# Altium PCB ESP32_LED_Matrix_Partially_Unrouted.PcbDoc
Units mm, origin at the board's own origin, x right, y up, seen from the top; angles counter-clockwise.
Board outline 83 x 52.3 mm, 2 copper layers (Top Layer, Bottom Layer), stack 1.671 mm thick; 168 components, 98 nets, 513 pads, 143 vias.
Unrouted connection lines stored in the file: 136.
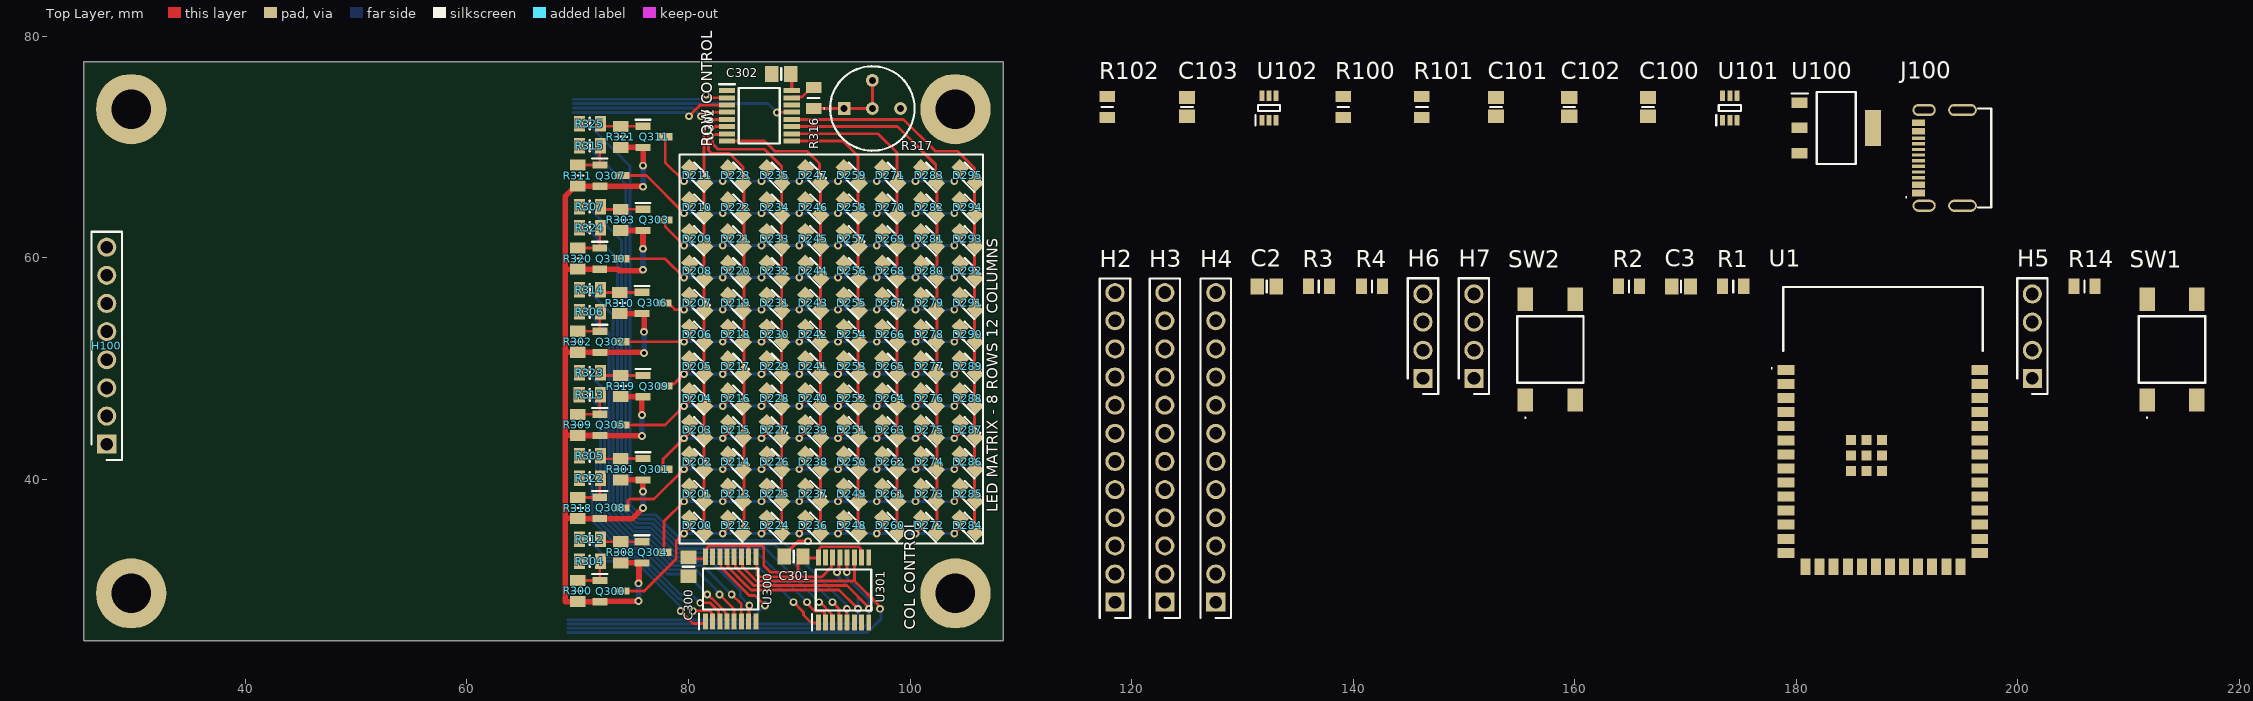
[diagram p0: Top Layer view]
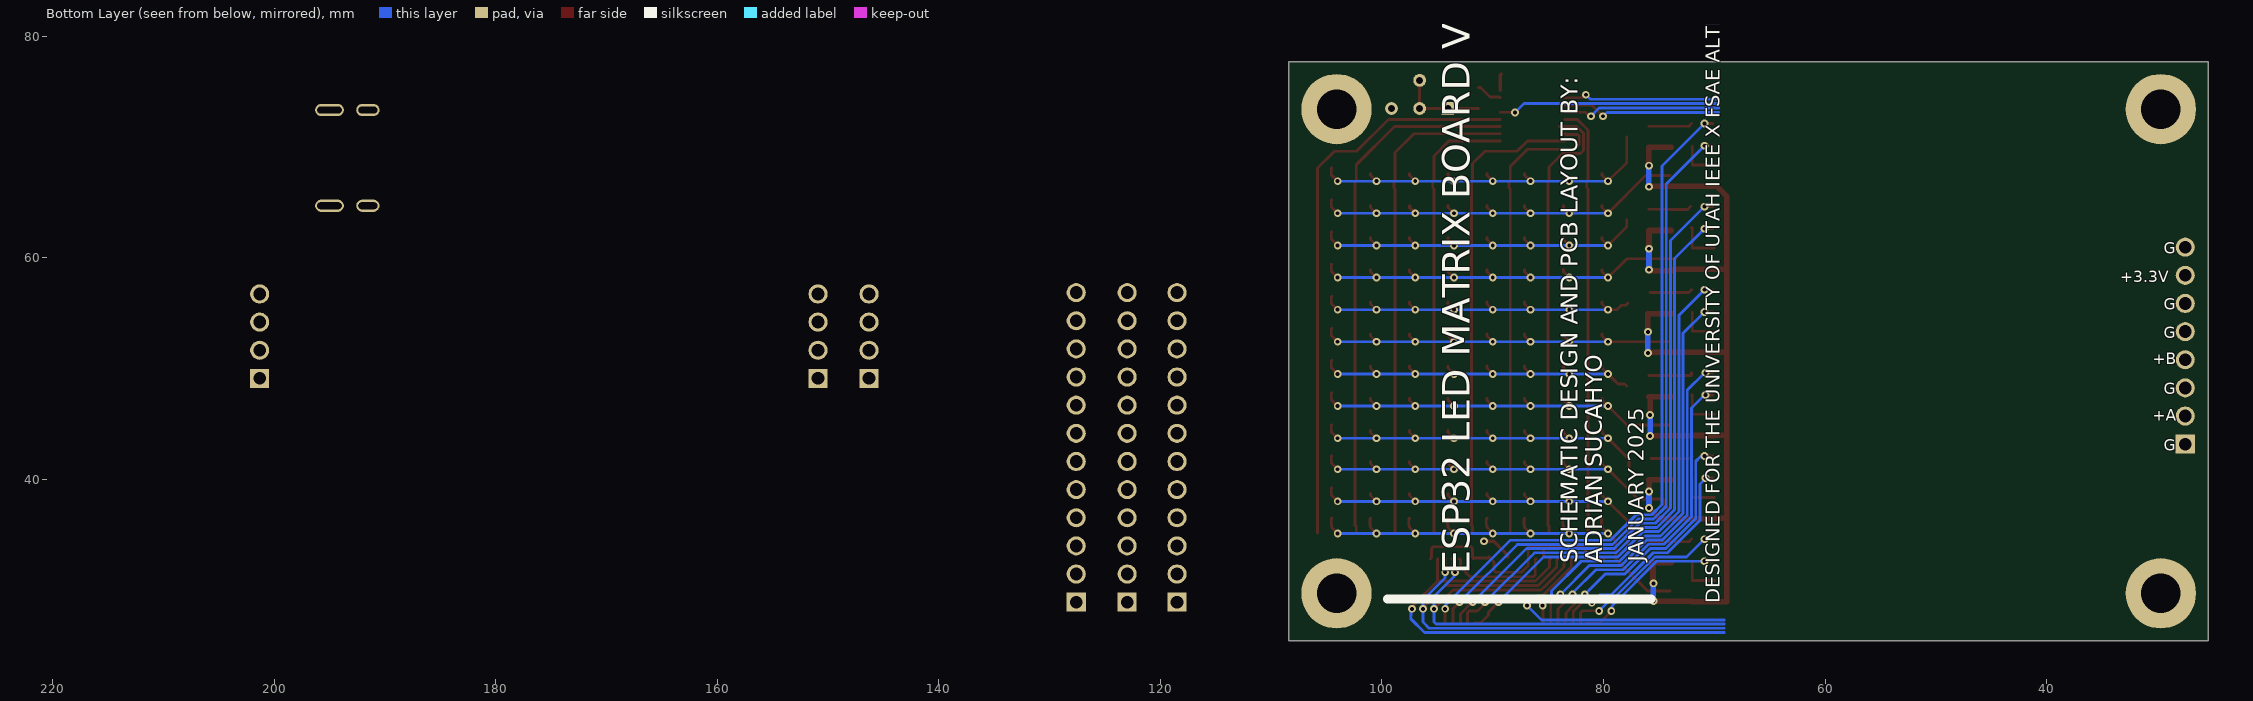
[diagram p1: Bottom Layer view, seen from below]

## Layer stack, top to bottom
Top Solder: solder mask 0.0102, Solder Resist, Dk 3.5
Top Layer: signal copper 0.0356
Dielectric 1: dielectric 1.6, FR-4, Dk 4.8
Bottom Layer: signal copper 0.0356
Bottom Solder: solder mask 0.0102, Solder Resist, Dk 3.5

## Board outline
25.4,25.4 108.4,25.4 108.4,77.7 25.4,77.7

## Design rules (kind name [scope] priority, off if disabled: settings)
Clearance [All] p1: gap=0.127 ignorepadtopadclearanceinfootprint=TRUE
ComponentClearance [All] p1: gap=0 collisioncheckmode=3 verticalgap=0.05 showdistances=FALSE
DiffPairsRouting [All] p1: maxlimit=0.254 minlimit=0.127 mostfreqgap=0.254 toplayer_minwidth=0.1 toplayer_maxwidth=0.5 toplayer_prefwidth=0.381 bottomlayer_minwidth=0.1 bottomlayer_maxwidth=0.5 bottomlayer_prefwidth=0.381 maxuncoupledlength=12.7
HoleSize [All] p1: absolutevalues=TRUE maxlimit=15 minlimit=0.025 maxpercent=80.000 minpercent=20.000
MinimumSolderMaskSliver [All] p1: minsoldermaskwidth=0
PolygonConnect [All] p1: connectstyle=Relief reliefconductorwidth=0.254 reliefentries=4 polygonreliefangle="90 Angle" airgapwidth=0.254
RoomDefinition "LED Matrix" [InComponentClass('Room Definition1') vs False] p1: confinementstyle=ConfineIn formatcopy=TRUE lockcomponents=FALSE outline 68.5,25.4 108.4,25.4 108.4,77.7 68.5,77.7
RoutingVias [All] p1: holewidth=0.35 width=0.7 viastyle="Through Hole" minholewidth=0.3 minwidth=0.6 maxholewidth=1 maxwidth=2
SilkToSilkClearance [All] p1: silktosilkclearance=0
SilkToSolderMaskClearance [IsPad] p1: minsilkscreentomaskgap=0 clearancetoexposedcopper=TRUE
SolderMaskExpansion [All] p1: expansion=0.102 istentingtop=FALSE
SupplyNets "Schematic Supply Nets_9" [InNet('V_MCU')] p1: voltage=0.000
SupplyNets "Schematic Supply Nets_8" [InNet('VCC_2')] p2: voltage=0.000
SupplyNets "Schematic Supply Nets_7" [InNet('VCC_1')] p3: voltage=0.000
SupplyNets "Schematic Supply Nets_6" [InNet('GND')] p4: voltage=0.000
SupplyNets "Schematic Supply Nets_4" [InNet('+3.3')] p5: voltage=0.000
Width [All] p1: maxlimit=2 minlimit=0.1 preferedwidth=0.254
24 further rules are at their usual default settings.

## Classes and differential pairs
component class "Room Definition1": C300 C301 C302 D200 D201 D202 D203 D204 D205 D206 D207 D208 D209 D210 D211 D212 D213 D214 D215 D216 D217 D218 D219 D220 D221 D222 D223 D224 D225 D226 D227 D228 D229 D230 D231 D232 D233 D234 D235 D236 D237 D238 D239 D240 D241 D242 D243 D244 D245 D246 D247 D248 D249 D250 D251 D252 D253 D254 D255 D256 D257 D258 D259 D260 D261 D262 D263 D264 D265 D266 D267 D268 D269 D270 D271 D272 D273 D274 D275 D276 D277 D278 D279 D280 D281 D282 D283 D284 D285 D286 D287 D288 D289 D290 D291 D292 D293 D294 D295 Q300 Q301 Q302 Q303 Q304 Q305 Q306 Q307 Q308 Q309 Q310 Q311 R300 R301 R302 R303 R304 R305 R306 R307 R308 R309 R310 R311 R312 R313 R314 R315 R316 R317 R318 R319 R320 R321 R322 R323 R324 R325 U300 U301 U302
component class Designator: D200 D201 D202 D203 D204 D205 D206 D207 D208 D209 D210 D211 D212 D213 D214 D215 D216 D217 D218 D219 D220 D221 D222 D223 D224 D225 D226 D227 D228 D229 D230 D231 D232 D233 D234 D235 D236 D237 D238 D239 D240 D241 D242 D243 D244 D245 D246 D247 D248 D249 D250 D251 D252 D253 D254 D255 D256 D257 D258 D259 D260 D261 D262 D263 D264 D265 D266 D267 D268 D269 D270 D271 D272 D273 D274 D275 D276 D277 D278 D279 D280 D281 D282 D283 D284 D285 D286 D287 D288 D289 D290 D291 D292 D293 D294 D295
net class ROW[0..7]: ROW0 ROW1 ROW2 ROW3 ROW4 ROW5 ROW6 ROW7
net class COL_SIG[0..11]: COL_SIG0 COL_SIG1 COL_SIG2 COL_SIG3 COL_SIG4 COL_SIG5 COL_SIG6 COL_SIG7 COL_SIG8 COL_SIG9 COL_SIG10 COL_SIG11
net class COL[0..11]: COL0 COL1 COL2 COL3 COL4 COL5 COL6 COL7 COL8 COL9 COL10 COL11
component class "Power Supply": C100 C101 C102 C103 H100 J100 R100 R101 R102 U100 U101 U102
component class Designator: C300 C301 C302 Q300 Q301 Q302 Q303 Q304 Q305 Q306 Q307 Q308 Q309 Q310 Q311 R300 R301 R302 R303 R304 R305 R306 R307 R308 R309 R310 R311 R312 R313 R314 R315 R316 R317 R318 R319 R320 R321 R322 R323 R324 R325 U300 U301 U302
component class Microcontroller: C2 C3 H2 H3 H4 H5 H6 H7 R1 R2 R3 R4 R14 SW1 SW2 U1
differential pair USB_D: +USB_D_P -USB_D_N

## Components (designator, comment, footprint, x,y, rotation, side; value= is the part's Value field where it differs from the comment)
C2 "100n" CAP0805 132.2,57.4 r0 top
C3 "1u" CAP0805 169.6,57.4 r0 top
C100 "100n" CAP0805 166.6,73.6 r90 top
C101 "100n" CAP0805 152.9,73.6 r90 top
C102 "100n" CAP0805 159.5,73.6 r90 top
C103 "100n" CAP0805 125,73.6 r90 top
C300 "100n" CAP0805 80,32.1 r270 top locked
C301 "100n" CAP0805 89.498,33.017 r180 top locked
C302 "100n" CAP0805 88.38,76.577 r180 top locked
D200 "LED" LEDM2012X80N 80.8,35.827 r135 top locked
D201 "LED" LEDM2012X80N 80.8,38.7 r135 top locked
D202 "LED" LEDM2012X80N 80.8,41.573 r135 top locked
D203 "LED" LEDM2012X80N 80.8,44.446 r135 top locked
D204 "LED" LEDM2012X80N 80.8,47.319 r135 top locked
D205 "LED" LEDM2012X80N 80.8,50.192 r135 top locked
D206 "LED" LEDM2012X80N 80.8,53.065 r135 top locked
D207 "LED" LEDM2012X80N 80.8,55.939 r135 top locked
D208 "LED" LEDM2012X80N 80.8,58.812 r135 top locked
D209 "LED" LEDM2012X80N 80.8,61.685 r135 top locked
D210 "LED" LEDM2012X80N 80.8,64.558 r135 top locked
D211 "LED" LEDM2012X80N 80.8,67.431 r135 top locked
D212 "LED" LEDM2012X80N 84.286,35.827 r135 top locked
D213 "LED" LEDM2012X80N 84.286,38.7 r135 top locked
D214 "LED" LEDM2012X80N 84.286,41.573 r135 top locked
D215 "LED" LEDM2012X80N 84.286,44.446 r135 top locked
D216 "LED" LEDM2012X80N 84.286,47.319 r135 top locked
D217 "LED" LEDM2012X80N 84.286,50.192 r135 top locked
D218 "LED" LEDM2012X80N 84.286,53.065 r135 top locked
D219 "LED" LEDM2012X80N 84.286,55.939 r135 top locked
D220 "LED" LEDM2012X80N 84.286,58.812 r135 top locked
D221 "LED" LEDM2012X80N 84.286,61.685 r135 top locked
D222 "LED" LEDM2012X80N 84.286,64.558 r135 top locked
D223 "LED" LEDM2012X80N 84.286,67.431 r135 top locked
D224 "LED" LEDM2012X80N 87.771,35.827 r135 top locked
D225 "LED" LEDM2012X80N 87.771,38.7 r135 top locked
D226 "LED" LEDM2012X80N 87.771,41.573 r135 top locked
D227 "LED" LEDM2012X80N 87.771,44.446 r135 top locked
D228 "LED" LEDM2012X80N 87.771,47.319 r135 top locked
D229 "LED" LEDM2012X80N 87.771,50.192 r135 top locked
D230 "LED" LEDM2012X80N 87.771,53.065 r135 top locked
D231 "LED" LEDM2012X80N 87.771,55.939 r135 top locked
D232 "LED" LEDM2012X80N 87.771,58.812 r135 top locked
D233 "LED" LEDM2012X80N 87.771,61.685 r135 top locked
D234 "LED" LEDM2012X80N 87.771,64.558 r135 top locked
D235 "LED" LEDM2012X80N 87.771,67.431 r135 top locked
D236 "LED" LEDM2012X80N 91.257,35.827 r135 top locked
D237 "LED" LEDM2012X80N 91.257,38.7 r135 top locked
D238 "LED" LEDM2012X80N 91.257,41.573 r135 top locked
D239 "LED" LEDM2012X80N 91.257,44.446 r135 top locked
D240 "LED" LEDM2012X80N 91.257,47.319 r135 top locked
D241 "LED" LEDM2012X80N 91.257,50.192 r135 top locked
D242 "LED" LEDM2012X80N 91.257,53.065 r135 top locked
D243 "LED" LEDM2012X80N 91.257,55.939 r135 top locked
D244 "LED" LEDM2012X80N 91.257,58.812 r135 top locked
D245 "LED" LEDM2012X80N 91.257,61.685 r135 top locked
D246 "LED" LEDM2012X80N 91.257,64.558 r135 top locked
D247 "LED" LEDM2012X80N 91.257,67.431 r135 top locked
D248 "LED" LEDM2012X80N 94.743,35.827 r135 top locked
D249 "LED" LEDM2012X80N 94.743,38.7 r135 top locked
D250 "LED" LEDM2012X80N 94.743,41.573 r135 top locked
D251 "LED" LEDM2012X80N 94.743,44.446 r135 top locked
D252 "LED" LEDM2012X80N 94.743,47.319 r135 top locked
D253 "LED" LEDM2012X80N 94.743,50.192 r135 top locked
D254 "LED" LEDM2012X80N 94.743,53.065 r135 top locked
D255 "LED" LEDM2012X80N 94.743,55.939 r135 top locked
D256 "LED" LEDM2012X80N 94.743,58.812 r135 top locked
D257 "LED" LEDM2012X80N 94.743,61.685 r135 top locked
D258 "LED" LEDM2012X80N 94.743,64.558 r135 top locked
D259 "LED" LEDM2012X80N 94.743,67.431 r135 top locked
D260 "LED" LEDM2012X80N 98.229,35.827 r135 top locked
D261 "LED" LEDM2012X80N 98.229,38.7 r135 top locked
D262 "LED" LEDM2012X80N 98.229,41.573 r135 top locked
D263 "LED" LEDM2012X80N 98.229,44.446 r135 top locked
D264 "LED" LEDM2012X80N 98.229,47.319 r135 top locked
D265 "LED" LEDM2012X80N 98.229,50.192 r135 top locked
D266 "LED" LEDM2012X80N 98.229,53.065 r135 top locked
D267 "LED" LEDM2012X80N 98.229,55.939 r135 top locked
D268 "LED" LEDM2012X80N 98.229,58.812 r135 top locked
D269 "LED" LEDM2012X80N 98.229,61.685 r135 top locked
D270 "LED" LEDM2012X80N 98.229,64.558 r135 top locked
D271 "LED" LEDM2012X80N 98.229,67.431 r135 top locked
D272 "LED" LEDM2012X80N 101.714,35.827 r135 top locked
D273 "LED" LEDM2012X80N 101.714,38.7 r135 top locked
D274 "LED" LEDM2012X80N 101.714,41.573 r135 top locked
D275 "LED" LEDM2012X80N 101.714,44.446 r135 top locked
D276 "LED" LEDM2012X80N 101.714,47.319 r135 top locked
D277 "LED" LEDM2012X80N 101.714,50.192 r135 top locked
D278 "LED" LEDM2012X80N 101.714,53.065 r135 top locked
D279 "LED" LEDM2012X80N 101.714,55.939 r135 top locked
D280 "LED" LEDM2012X80N 101.714,58.812 r135 top locked
D281 "LED" LEDM2012X80N 101.714,61.685 r135 top locked
D282 "LED" LEDM2012X80N 101.714,64.558 r135 top locked
D283 "LED" LEDM2012X80N 101.714,67.431 r135 top locked
D284 "LED" LEDM2012X80N 105.2,35.827 r135 top locked
D285 "LED" LEDM2012X80N 105.2,38.7 r135 top locked
D286 "LED" LEDM2012X80N 105.2,41.573 r135 top locked
D287 "LED" LEDM2012X80N 105.2,44.446 r135 top locked
D288 "LED" LEDM2012X80N 105.2,47.319 r135 top locked
D289 "LED" LEDM2012X80N 105.2,50.192 r135 top locked
D290 "LED" LEDM2012X80N 105.2,53.065 r135 top locked
D291 "LED" LEDM2012X80N 105.2,55.939 r135 top locked
D292 "LED" LEDM2012X80N 105.2,58.812 r135 top locked
D293 "LED" LEDM2012X80N 105.2,61.685 r135 top locked
D294 "LED" LEDM2012X80N 105.2,64.558 r135 top locked
D295 "LED" LEDM2012X80N 105.2,67.431 r135 top locked
H2 "Header" Header_1X12 118.5,28.9 r90 top
H3 "Header" Header_1X12 123,28.9 r90 top
H4 "Header" Header_1X12 127.6,28.9 r90 top
H5 "4-Pin Header" Header_1X4 201.3,49.1 r90 top
H6 "4-Pin Header" Header_1X4 146.3,49.1 r90 top
H7 "4-Pin Header" Header_1X4 150.9,49.1 r90 top
H100 "Header" Header_1X8 27.5,43.16 r90 top locked
J100 "USB C" "USB TYPE C 12 PIN" 194.2,69 r90 top
Q300 "SI2305" SOT23 73,29.9 r270 top locked
Q301 "SI2305" SOT23 76.9,40.9 r270 top locked
Q302 "SI2305" SOT23 73,52.4 r270 top locked
Q303 "SI2305" SOT23 76.9,63.4 r270 top locked
Q304 "SI2305" SOT23 76.8,33.4 r270 top locked
Q305 "SI2305" SOT23 73,44.9 r270 top locked
Q306 "SI2305" SOT23 76.795,55.905 r270 top locked
Q307 "SI2305" SOT23 73.003,67.397 r270 top locked
Q308 "SI2305" SOT23 72.995,37.405 r270 top locked
Q309 "SI2305" SOT23 76.9,48.4 r270 top locked
Q310 "SI2305" SOT23 72.995,59.905 r270 top locked
Q311 "SI2305" SOT23 76.895,70.905 r270 top locked
R1 "0" RESC0805 174.3,57.4 r0 top
R2 "0" RESC0805 164.9,57.4 r0 top
R3 "0" RESC0805 136.9,57.4 r0 top
R4 "0" RESC0805 141.7,57.4 r0 top
R14 "10k" RESC0805 206,57.4 r0 top
R100 "5.11k" RESC0805 139.1,73.6 r90 top
R101 "5.11k" RESC0805 146.2,73.6 r90 top
R102 "10k" RESC0805 117.8,73.6 r90 top
R300 "100k" RESC0805 70.01,29.91 r90 top locked
R301 "100k" RESC0805 73.905,40.895 r90 top locked
R302 "100k" RESC0805 69.995,52.405 r90 top locked
R303 "100k" RESC0805 73.905,63.395 r90 top locked
R304 "10k" RESC0805 71.1,32.6 r0 top locked
R305 "10k" RESC0805 71.1,42.1 r0 top locked
R306 "10k" RESC0805 71.1,55.1 r0 top locked
R307 "10k" RESC0805 71.1,64.6 r0 top locked
R308 "100k" RESC0805 73.9,33.4 r90 top locked
R309 "100k" RESC0805 70,44.9 r90 top locked
R310 "100k" RESC0805 73.8,55.9 r90 top locked
R311 "100k" RESC0805 70.01,67.41 r90 top locked
R312 "10k" RESC0805 71.1,34.6 r0 top locked
R313 "10k" RESC0805 71.096,47.6 r0 top locked
R314 "10k" RESC0805 71.1,57.1 r0 top locked
R315 "10k" RESC0805 71.1,70.1 r0 top locked
R316 "1k" RESC0805 91.3,74.4 r270 top locked
R317 "50k" 3339P1103LF 94.06,73.46 r0 top locked
R318 "100k" RESC0805 70.005,37.395 r90 top locked
R319 "100k" RESC0805 73.9,48.4 r90 top locked
R320 "100k" RESC0805 70.01,59.91 r90 top locked
R321 "100k" RESC0805 73.9,70.9 r90 top locked
R322 "10k" RESC0805 71.1,40.1 r0 top locked
R323 "10k" RESC0805 71.1,49.6 r0 top locked
R324 "10k" RESC0805 71.1,62.7 r0 top locked
R325 "10k" RESC0805 71.1,72.1 r0 top locked
SW1 "TS04-66-73-BK-100-SMT" "Tactile Button 6.0mm x 6.0mm" 213.9,51.7 r90 top
SW2 "TS04-66-73-BK-100-SMT" "Tactile Button 6.0mm x 6.0mm" 157.8,51.7 r90 top
U1 "ESP32-S3-WROOM-1-N8" ESP32-S3-WROOM-1-N8 188.2,44.6 r0 top
U100 "AZ1117CH2-3.3TRG1" SOT223 183.6,71.7 r0 top
U101 "LM66100DCKR" SC70-6 174,73.5 r90 top
U102 "LM66100DCKR" SC70-6 132.4,73.5 r90 top
U300 "74HC595" TSSOP16 83.805,30.077 r90 top locked
U301 "74HC595" TSSOP16 94,30 r90 top locked
U302 "STP08DP05TTR" TSSOP16 86.4,72.8 r0 top locked

## Footprints (in the part's own frame and the unit in brackets; to place one, negate y for a bottom-side part, rotate by r counter-clockwise, add the part's x,y. Pads: shape width x height; smd on the part's side, far side on the other; paste and mask are expansions set on the pad)
3339P1103LF [mm]
  rect 1.155x1.155 hole 0.63: 1(0,0)
  round 1.155 hole 0.63: 2(2.54,0) 2(2.54,2.54) 3(5.08,0)
  silkscreen extent -1.86,-3.81 6.35,3.81, body extent -1.27,-3.81 6.35,3.81, height 6.42
CAP0805 [mm] "Chip Capacitor, 2-Leads, Body 2.00x1.20mm, IPC Medium Density"
  rect 1.2x1.45 smd: 1(-0.85,0) 2(0.85,0)
  silkscreen extent 0,-0.53 0,0.53, body extent -1,-0.63 1,0.63, height 1.1
ESP32-S3-WROOM-1-N8 [mm]
  rect 1.5x0.9 smd: 1(-9.131,5.26) 2(-9.131,3.99) 3(-9.131,2.72) 4(-9.131,1.45) 5(-9.131,0.18) 6(-9.131,-1.09) 7(-9.131,-2.36) 8(-9.131,-3.63) 9(-9.131,-4.9) 10(-9.131,-6.17) 11(-9.131,-7.44) 12(-9.131,-8.71) 13(-9.131,-9.98) 14(-9.131,-11.25) 27(8.369,-11.25) 28(8.369,-9.98) 29(8.369,-8.71) 30(8.369,-7.44) 31(8.369,-6.17) 32(8.369,-4.9) 33(8.369,-3.63) 34(8.369,-2.36) 35(8.369,-1.09) 36(8.369,0.18) 37(8.369,1.45) 38(8.369,2.72) 39(8.369,3.99) 40(8.369,5.26)
  rect 0.9x1.5 smd: 15(-7.366,-12.5) 16(-6.096,-12.5) 17(-4.826,-12.5) 18(-3.556,-12.5) 19(-2.286,-12.5) 20(-1.016,-12.5) 21(0.254,-12.5) 22(1.524,-12.5) 23(2.794,-12.5) 24(4.064,-12.5) 25(5.334,-12.5) 26(6.604,-12.5)
  rect 0.9x0.9 smd: 41(-1.881,-2.46) 42(-1.881,-1.06) 43(-3.281,-1.06) 44(-3.281,-2.46) 45(-3.281,-3.86) 46(-1.881,-3.86) 47(-0.481,-3.86) 48(-0.481,-2.46) 49(-0.481,-1.06)
  silkscreen extent -10.48,5.35 8.62,12.75, body extent -9.38,-12.75 8.62,12.75, height 2.7
Header_1X4 [mm]
  rect 1.725x1.725 hole 1.15: 1(0,0)
  round 1.725 hole 1.15: 2(2.54,0) 3(5.08,0) 4(7.62,0)
  silkscreen extent -1.42,-1.37 9.04,1.37
Header_1X8 [mm]
  rect 1.725x1.725 hole 1.15: 1(0,0)
  round 1.725 hole 1.15: 2(2.54,0) 3(5.08,0) 4(7.62,0) 5(10.16,0) 6(12.7,0) 7(15.24,0) 8(17.78,0)
  silkscreen extent -1.42,-1.37 19.18,1.37
Header_1X12 [mm]
  rect 1.725x1.725 hole 1.15: 1(0,0)
  round 1.725 hole 1.15: 2(2.54,0) 3(5.08,0) 4(7.62,0) 5(10.16,0) 6(12.7,0) 7(15.24,0) 8(17.78,0) 9(20.32,0) 10(22.86,0) 11(25.4,0) 12(27.94,0)
  silkscreen extent -1.42,-1.37 29.21,1.37
LEDM2012X80N [mm]
  rect 1.2x1.05 smd: 1(-0.95,0) 2(0.95,0)
  silkscreen extent -1.47,-0.62 1,0.63, body extent -1,-0.62 1,0.62, height 0.7
RESC0805 [mm] "Chip Resistor, 2-Leads, Body 2.00x1.20mm, IPC Medium Density"
  rect 1x1.4 smd: 1(-0.95,0) 2(0.95,0)
  silkscreen extent 0,-0.53 0,0.53, body extent -1,-0.63 1,0.63, height 0.5
SC70-6 [mm]
  rect 0.95x0.45 smd: 1(-1.1,0.65) 2(-1.1,0) 3(-1.1,-0.65) 4(1.1,-0.65) 5(1.1,0) 6(1.1,0.65)
  silkscreen extent -1.58,-1 0.28,1.22, body extent -1.05,-1 1.05,1, height 1
SOT23 [mm]
  rect 0.65x1.35 smd: 1(-0.96,-1) 2(0.96,-1) 3(0,1)
  silkscreen extent -1.54,-1.68 -1.54,-0.33, body extent -1.45,-1.2 1.45,1.2, height 0.95
SOT223 [mm]
  rect 1.45x0.95 smd: 1(-3.3,2.29) 2(-3.3,0) 3(-3.3,-2.29)
  rect 1.45x3.25 smd: 4(3.3,0)
  silkscreen extent -4.03,-3.25 1.75,3.25, body extent -3.35,-3.15 3.35,3.15, height 1.8
"Tactile Button 6.0mm x 6.0mm" [mm]
  rect 2.1x1.4 smd: 1(-4.55,2.25) 2(4.55,2.25) 3(-4.55,-2.25) 4(4.55,-2.25)
  silkscreen extent -6.2,-3 3,3, body extent -5,-3 5,3, height 7.4
TSSOP16 [mm]
  rect 1.45x0.45 smd: 1(-2.925,2.275) 2(-2.925,1.625) 3(-2.925,0.975) 4(-2.925,0.325) 5(-2.925,-0.325) 6(-2.925,-0.975) 7(-2.925,-1.625) 8(-2.925,-2.275) 9(2.925,-2.275) 10(2.925,-1.625) 11(2.925,-0.975) 12(2.925,-0.325) 13(2.925,0.325) 14(2.925,0.975) 15(2.925,1.625) 16(2.925,2.275)
  silkscreen extent -3.65,-2.5 1.85,2.85, body extent -3.2,-2.5 3.2,2.5, height 1.2
"USB TYPE C 12 PIN" [mm]
  oval 1.1x2.6 hole 0.6 slot 2.2 at 90 deg: 1(-4.32,-0.8) 16(4.32,-0.8)
  oval 1.1x2.1 hole 0.6 slot 1.7 at 90 deg: 2(-4.318,2.667) 15(4.318,2.667)
  rect 0.6x1.2 smd: 3(3.175,3.175) 4(2.413,3.175) 13(-2.413,3.175) 14(-3.175,3.175)
  rect 0.3x1.2 smd: 5(1.778,3.175) 6(1.27,3.175) 7(0.762,3.175) 8(0.254,3.175) 9(-0.254,3.175) 10(-0.762,3.175) 11(-1.27,3.175) 12(-1.778,3.175)
  silkscreen extent -4.47,-3.4 4.47,4.32, body extent -4.34,-3.47 4.6,3.43, height 3.26

## Part data
C2 C3 C100 C101 C102 C103 C300 C301 C302: library part "Capacitor - Non Polarized", "Non Polarized Capacitor"
D200 D201 D202 D203 D204 D205 D206 D207 D208 D209 D210 D211 D212 D213 D214 D215 D216 D217 D218 D219 D220 D221 D222 D223 D224 D225 D226 D227 D228 D229 D230 D231 D232 D233 D234 D235 D236 D237 D238 D239 D240 D241 D242 D243 D244 D245 D246 D247 D248 D249 D250 D251 D252 D253 D254 D255 D256 D257 D258 D259 D260 D261 D262 D263 D264 D265 D266 D267 D268 D269 D270 D271 D272 D273 D274 D275 D276 D277 D278 D279 D280 D281 D282 D283 D284 D285 D286 D287 D288 D289 D290 D291 D292 D293 D294 D295: "General Purpose LED", ComponentLink1Description=Datasheet, ComponentLink1URL=https://www.smc-diodes.com/propdf/1N4148W%20N0571%20REV.E.pdf
H2 H3 H4: library part "12-Pin Header", "12-Pin Header"
H100: library part "8-Pin Header", "8-Pin Header", System=Connector
J100: library part "USB Type C Connector 12 Pin"
Q300 Q301 Q302 Q303 Q304 Q305 Q306 Q307 Q308 Q309 Q310 Q311: "General Purpose P-Channel MOSFET", ComponentLink1Description=Datasheet, ComponentLink1URL=https://www.vishay.com/docs/64847/si2305cd.pdf
R1 R2 R3 R4 R14 R100 R101 R102 R300 R301 R302 R303 R304 R305 R306 R307 R308 R309 R310 R311 R312 R313 R314 R315 R316 R318 R319 R320 R321 R322 R323 R324 R325: library part Resistor, "Resistor"
R317: library part Potentiometer, "Potentionmeter"
SW1 SW2: "Switch", Manufacturer_Name="Same Sky", Mouser Part Number=179-TS046673BK100SMT, Arrow Part Number=TS04-66-73-BK-100-SMT, Arrow Price/Stock=https://www.arrow.com/en/products/ts04-66-73-bk-100-smt/cui-devices?utm_currency=USD&region=nac, Datasheet Link=https://www.sameskydevices.com/product/resource/supplyframepdf/ts04.pdf, Height=7.6mm, Manufacturer_Part_Number=TS04-66-73-BK-100-SMT, Mouser Price/Stock=https://www.mouser.co.uk/ProductDetail/Same-Sky/TS04-66-73-BK-100-SMT?qs=A6eO%252BMLsxmRAmp3wqRUzZw%3D%3D
U1: "ESP32 Microcontroller with Bluetooth and Wifi"
U100: library part AZ1117CH2-3.3TRG1_1, "3.3V Linear Voltage Regulator"
U101 U102: "5.5-V, 1.5-A 79-mΩ, Low IQ Ideal Diode With Input Polarity Protection", Manufacturer_Name="Texas Instruments", Mouser Part Number=595-LM66100DCKR, Arrow Part Number=LM66100DCKR, Arrow Price/Stock=https://www.arrow.com/en/products/lm66100dckr/texas-instruments?region=nac, Datasheet Link=http://www.ti.com/lit/gpn/LM66100, Height=1.1mm, Manufacturer_Part_Number=LM66100DCKR, Mouser Price/Stock=https://www.mouser.co.uk/ProductDetail/Texas-Instruments/LM66100DCKR?qs=vLWxofP3U2y2yPPrXoBBoA%3D%3D
U300 U301: "Shift Register"
U302: "LED Driver", Manufacturer_Name=STMicroelectronics, Mouser Part Number=511-STP08DP05TTR, Arrow Part Number=STP08DP05TTR, Arrow Price/Stock=https://www.arrow.com/en/products/stp08dp05ttr/stmicroelectronics?region=nac, Datasheet Link=https://componentsearchengine.com/Datasheets/2/STP08DP05TTR.pdf, Height=1.2mm, Manufacturer_Part_Number=STP08DP05TTR, Mouser Price/Stock=https://www.mouser.co.uk/ProductDetail/STMicroelectronics/STP08DP05TTR?qs=xgiOkRdDJ0m7T%2FaY25F5vQ%3D%3D

## Free pads (board coordinates)
  round 6.35 hole 3.556: 7(29.7,29.7) 7(29.7,73.4) 7(104.1,29.7) 7(104.1,73.4)

## Via types
v1: diameter 0.7, hole 0.35, Top Layer to Bottom Layer, tented both sides, 143 vias

## Nets (pads, with @x,y where several pads share a name; then routed paths per layer and width w, separated by ;. In a path a pad name is that pad's centre, name@x,y a point inside that pad or via, vN(x,y) a via of type N, cw(c..) or ccw(c..) an arc to the next point about the centre after c; other vN are vias at no path point)
+3.3: C2.1 C100.1 C103.1 C300.1 C301.1 C302.1 H2.1 H5.1 H6.1 H6.2 H6.3 H6.4 R14.1 U1.2 U101.6 U102.6 U300.10 U300.16 U301.10 U301.16 U302.16 | length 24.2
  Top Layer w0.254: C300.1@79.875,32.95 C300.1 ; C300.1@80,32.825 81.525,32.825 81.628,32.928 81.628,33.6 81.701,33.673 81.701,33.832 81.879,34.01 85.376,34.01 ; U300.10 85.426,33.006 85.426,33.959 85.376,34.01 ; C301.1@90.35,32.9 91.65,32.9 91.725,32.825 91.823,32.923 91.823,33.755 91.972,33.904 95.378,33.904 95.527,33.755 95.527,32.923 U301.10@95.625,32.825 ; C301.1@90.35,33 89.877,32.527 89.877,31.749 89.728,31.6 87.4,31.6 86.8,32.2 86.8,33.861 86.651,34.01 85.376,34.01
  Top Layer w0.3: C302.1 89.325,76.482 U302.16
COL0: D200.2 D212.2 D224.2 D236.2 D248.2 D260.2 D272.2 D284.2 Q300.3 | length 46.2
  Top Layer w0.254: Q300.3 76.015,29.9 78.9,32.785 78.9,34.4 v1(79.6,35.1) 80.128,35.628 80.128,35.803 80.181,35.856 80.181,36.419 D200.2@80.128,36.472 ; v1(83.1,35.1) 83.628,35.628 83.628,35.803 83.681,35.856 83.681,36.419 D212.2@83.628,36.472 ; v1(86.6,35.1) 87.128,35.628 87.128,35.803 87.181,35.856 87.181,36.419 D224.2@87.128,36.472 ; v1(90,35.1) 90.528,35.628 90.528,35.803 90.581,35.856 90.581,36.419 D236.2@90.528,36.472 ; v1(93.5,35.1) 94.028,35.628 94.028,35.803 94.081,35.856 94.081,36.419 D248.2@94.028,36.472 ; v1(97,35.1) 97.528,35.628 97.528,35.803 97.581,35.856 97.581,36.419 D260.2@97.528,36.472 ; v1(100.5,35.1) 101.028,35.628 101.028,35.803 101.081,35.856 101.081,36.419 D272.2@101.028,36.472 ; v1(104,35.1) 104.528,35.628 104.528,35.803 104.581,35.856 104.581,36.419 104.528,36.472 D284.2@104.502,36.498
  Bottom Layer w0.254: v1(79.6,35.1) v1(93.5,35.1) v1(100.5,35.1) v1(104,35.1)
COL1: D201.2 D213.2 D225.2 D237.2 D249.2 D261.2 D273.2 D285.2 Q304.3 | length 37.7
  Top Layer w0.254: Q304.3 77.8,36.2 v1(79.6,38) 80.128,38.528 D201.2@80.128,38.703 ; v1(83.1,38) 83.628,38.528 D213.2@83.628,38.703 ; v1(86.6,38) 87.128,38.528 D225.2@87.128,38.703 ; v1(90,38) 90.528,38.528 D237.2@90.528,38.703 ; v1(93.5,38) 94.028,38.528 D249.2@94.028,38.703 ; v1(97,38) 97.528,38.528 D261.2@97.528,38.703 ; v1(100.5,38) 101.028,38.528 D273.2@101.028,38.703 ; v1(104,38) 104.528,38.528 104.528,38.534 104.581,38.587 104.581,39.15 D285.2@104.528,39.203
  Bottom Layer w0.254: v1(79.6,38) v1(100.5,38) v1(104,38)
COL2: D202.2 D214.2 D226.2 D238.2 D250.2 D262.2 D274.2 D286.2 Q308.3 | length 39.6
  Top Layer w0.254: Q308.3@74,37.4 74.35,37.4 74.548,37.598 74.548,38.051 74.697,38.2 76.9,38.2 v1(79.6,40.9) 80.128,41.428 D202.2@80.128,41.603 ; v1(83.1,40.9) 83.628,41.428 D214.2@83.628,41.603 ; v1(86.6,40.9) 87.128,41.428 D226.2@87.128,41.603 ; v1(90,40.9) 90.528,41.428 D238.2@90.528,41.603 ; v1(93.5,40.9) 94.028,41.428 D250.2@94.028,41.603 ; v1(97,40.9) 97.528,41.428 D262.2@97.528,41.603 ; v1(100.5,40.9) 101.028,41.428 D274.2@101.028,41.603 ; v1(104,40.9) 104.528,41.428 104.528,41.434 104.581,41.487 104.581,42.05 D286.2@104.528,42.103
  Bottom Layer w0.254: v1(79.6,40.9) v1(100.5,40.9) v1(104,40.9)
COL3: D203.2 D215.2 D227.2 D239.2 D251.2 D263.2 D275.2 D287.2 Q301.3 | length 35.9
  Top Layer w0.254: Q301.3@77.7,40.9 77.7,41.8 v1(79.6,43.7) 80.128,44.228 D203.2@80.128,44.403 ; v1(83.1,43.7) 83.628,44.228 D215.2@83.628,44.403 ; v1(86.6,43.7) 87.128,44.228 D227.2@87.128,44.403 ; v1(90,43.7) 90.528,44.228 90.528,44.403 ; v1(93.5,43.7) 94.028,44.228 94.028,44.403 ; v1(97,43.7) 97.528,44.228 97.528,44.403 ; v1(100.5,43.7) 101.028,44.228 D275.2@101.028,44.403 ; v1(104,43.7) 104.528,44.228 104.528,44.234 104.581,44.287 104.581,44.85 D287.2@104.528,44.903
  Bottom Layer w0.254: v1(79.6,43.7) v1(100.5,43.7) v1(104,43.7)
COL4: D204.2 D216.2 D228.2 D240.2 D252.2 D264.2 D276.2 D288.2 Q305.3 | length 38.6
  Top Layer w0.254: Q305.3 77.9,44.9 v1(79.6,46.6) 80.128,47.128 D204.2@80.128,47.303 ; v1(83.1,46.6) 83.628,47.128 D216.2@83.628,47.303 ; v1(86.6,46.6) 87.128,47.128 D228.2@87.128,47.303 ; v1(90,46.6) 90.528,47.128 90.528,47.303 ; v1(93.5,46.6) 94.028,47.128 D252.2@94.028,47.303 ; v1(97,46.6) 97.528,47.128 D264.2@97.528,47.303 ; v1(100.5,46.6) 101.028,47.128 D276.2@101.028,47.303 ; v1(104,46.6) 104.528,47.128 104.528,47.134 104.581,47.187 104.581,47.75 D288.2@104.528,47.803
  Bottom Layer w0.254: v1(79.6,46.6) v1(100.5,46.6) v1(104,46.6)
COL5: D205.2 D217.2 D229.2 D241.2 D253.2 D265.2 D277.2 D289.2 Q309.3 | length 34.5
  Top Layer w0.254: Q309.3 78.098,48.598 78.698,48.598 79.076,48.976 v1(79.6,49.5) 80.128,50.028 D205.2@80.128,50.203 ; v1(83.1,49.5) 83.628,50.028 D217.2@83.628,50.203 ; v1(86.6,49.5) 87.128,50.028 D229.2@87.128,50.203 ; v1(90,49.5) 90.528,50.028 D241.2@90.528,50.203 ; v1(93.5,49.5) 94.028,50.028 D253.2@94.028,50.203 ; v1(97,49.5) 97.528,50.028 D265.2@97.528,50.203 ; v1(100.5,49.5) 101.028,50.028 D277.2@101.028,50.203 ; v1(104,49.5) 104.528,50.028 104.528,50.034 104.581,50.087 104.581,50.65 D289.2@104.528,50.703
  Bottom Layer w0.254: v1(79.6,49.5) v1(100.5,49.5) v1(104,49.5)
COL6: D206.2 D218.2 D230.2 D242.2 D254.2 D266.2 D278.2 D290.2 Q302.3 | length 37.9
  Top Layer w0.254: Q302.3 v1(79.6,52.4) 80.128,52.928 D206.2@80.128,53.103 ; v1(83.1,52.4) 83.628,52.928 D218.2@83.628,53.103 ; v1(86.6,52.4) 87.128,52.928 D230.2@87.128,53.103 ; v1(90,52.4) 90.528,52.928 D242.2@90.528,53.103 ; v1(93.5,52.4) 94.028,52.928 D254.2@94.028,53.103 ; v1(97,52.4) 97.528,52.928 D266.2@97.528,53.103 ; v1(100.5,52.4) 101.028,52.928 D278.2@101.028,53.103 ; v1(104,52.4) 104.528,52.928 104.528,52.934 104.581,52.987 104.581,53.55 D290.2@104.528,53.603
  Bottom Layer w0.254: v1(79.6,52.4) v1(100.5,52.4) v1(104,52.4)
COL7: D207.2 D219.2 D231.2 D243.2 D255.2 D267.2 D279.2 D291.2 Q306.3 | length 34.4
  Top Layer w0.254: Q306.3 77.8,55.9 77.998,55.702 78.398,55.702 78.8,55.3 v1(79.6,55.3) 80.128,55.828 D207.2@80.128,56.003 ; v1(83.1,55.3) 83.628,55.828 D219.2@83.628,56.003 ; v1(86.6,55.3) 87.128,55.828 D231.2@87.128,56.003 ; v1(90,55.3) 90.528,55.828 D243.2@90.528,56.003 ; v1(93.5,55.3) 94.028,55.828 D255.2@94.028,56.003 ; v1(97,55.3) 97.528,55.828 D267.2@97.528,56.003 ; v1(100.5,55.3) 101.028,55.828 D279.2@101.028,56.003 ; v1(104,55.3) 104.528,55.828 104.528,55.834 104.581,55.887 104.581,56.45 D291.2@104.528,56.503
  Bottom Layer w0.254: v1(79.6,55.3) v1(100.5,55.3) v1(104,55.3)
COL8: D208.2 D220.2 D232.2 D244.2 D256.2 D268.2 D280.2 D292.2 Q310.3 | length 39.1
  Top Layer w0.254: Q310.3@73.483,59.9 77.9,59.9 v1(79.6,58.2) 80.128,58.728 D208.2@80.128,58.903 ; v1(83.1,58.2) 83.628,58.728 D220.2@83.628,58.903 ; v1(86.6,58.2) 87.128,58.728 D232.2@87.128,58.903 ; v1(90,58.2) 90.528,58.728 D244.2@90.528,58.903 ; v1(93.5,58.2) 94.028,58.728 D256.2@94.028,58.903 ; v1(97,58.2) 97.528,58.728 D268.2@97.528,58.903 ; v1(100.5,58.2) 101.028,58.728 D280.2@101.028,58.903 ; v1(104,58.2) 104.528,58.728 104.528,58.734 104.581,58.787 104.581,59.35 D292.2@104.528,59.403
  Bottom Layer w0.254: v1(79.6,58.2) v1(100.5,58.2) v1(104,58.2)
COL9: D209.2 D221.2 D233.2 D245.2 D257.2 D269.2 D281.2 D293.2 Q303.3 | length 35.3
  Top Layer w0.254: Q303.3 77.9,62.8 v1(79.6,61.1) 80.128,61.628 D209.2@80.128,61.803 ; v1(83.1,61.1) 83.628,61.628 D221.2@83.628,61.803 ; v1(86.6,61.1) 87.128,61.628 D233.2@87.128,61.803 ; v1(90,61.1) 90.528,61.628 D245.2@90.528,61.803 ; v1(93.5,61.1) 94.028,61.628 D257.2@94.028,61.803 ; v1(97,61.1) 97.528,61.628 D269.2@97.528,61.803 ; v1(100.5,61.1) 101.028,61.628 D281.2@101.028,61.803 ; v1(104,61.1) 104.528,61.628 104.528,61.634 104.581,61.687 104.581,62.25 D293.2@104.528,62.303
  Bottom Layer w0.254: v1(79.6,61.1) v1(100.5,61.1) v1(104,61.1)
COL10: D210.2 D222.2 D234.2 D246.2 D258.2 D270.2 D282.2 D294.2 Q307.3 | length 40.2
  Top Layer w0.254: Q307.3@74,67.4 76.2,67.4 v1(79.6,64) 80.128,64.528 D210.2@80.128,64.703 ; v1(83.1,64) 83.628,64.528 D222.2@83.628,64.703 ; v1(86.6,64) 87.128,64.528 D234.2@87.128,64.703 ; v1(90,64) 90.528,64.528 D246.2@90.528,64.703 ; v1(93.5,64) 94.028,64.528 D258.2@94.028,64.703 ; v1(100.5,64) 101.028,64.528 D282.2@101.028,64.703 ; v1(104,64) 104.528,64.528 104.528,64.534 104.581,64.587 104.581,65.15 D294.2@104.528,65.203 ; D270.2@97.528,64.528 v1(97,64) D270.2@97.528,64.528 ; D270.2@97.528,64.528 97.528,64.703 D270.2@97.528,64.528
  Bottom Layer w0.254: v1(79.6,64) v1(100.5,64) v1(104,64)
COL11: D211.2 D223.2 D235.2 D247.2 D259.2 D271.2 D283.2 D295.2 Q311.3 | length 37
  Top Layer w0.254: Q311.3@77.9,70.9 77.9,68.6 v1(79.6,66.9) 80.128,67.428 D211.2@80.128,67.603 ; v1(83.1,66.9) 83.628,67.428 D223.2@83.628,67.603 ; v1(86.6,66.9) 87.128,67.428 D235.2@87.128,67.603 ; v1(90,66.9) 90.528,67.428 D247.2@90.528,67.603 ; v1(93.5,66.9) 94.028,67.428 D259.2@94.028,67.603 ; v1(97,66.9) 97.528,67.428 D271.2@97.528,67.603 ; v1(100.5,66.9) 101.028,67.428 D283.2@101.028,67.603 ; v1(104,66.9) 104.528,67.428 104.528,67.434 104.581,67.487 104.581,68.05 D295.2
  Bottom Layer w0.254: v1(79.6,66.9) v1(100.5,66.9) v1(104,66.9)
COL_DS: H2.5 U1.7 U300.14 | length 24.5
  Top Layer w0.254: U300.14@82.825,32.825 82.923,32.727 82.923,32.068 85.491,29.5 86,29.5 v1(86.9,28.6)
  Bottom Layer w0.254: 69.1,27.3 85.6,27.3 v1(86.9,28.6)
COL_OE: H2.4 U1.6 U300.13 U301.13 | length 47
  Top Layer w0.254: U300.13@83.475,32.825 83.573,32.727 83.573,32.068 85.122,30.519 85.641,30 93.6,30 v1(95.3,28.3) ; v1(93.4,31.6) 93.4,31.721 93.577,31.898 93.577,32.727 U301.13@93.675,32.825
  Bottom Layer w0.254: 69.1,26.919 95.108,26.919 95.3,27.111 v1(95.3,28.3) 95.3,29.4 93.485,31.215 93.485,31.515 v1(93.4,31.6)
COL_SH_CP: H2.2 U1.4 U300.11 U301.11 | length 46.7
  Top Layer w0.254: U300.11@84.775,32.825 84.873,32.727 84.873,32.068 86.141,30.8 95,30.8 ; U301.11@94.975,32.825 95,32.8 95,30.8 ; v1(97.3,28.3) 97.3,28.421 97.137,28.584 97.137,28.663 95,30.8
  Bottom Layer w0.254: 69.1,26.157 96.157,26.157 97.4,27.4 97.4,27.654 97.385,27.669 97.385,28.215 v1(97.3,28.3)
COL_SIG0: R304.1 U300.1 | length 13.9
  Top Layer w0.254: R304.1 v1(70.9,32.6) ; v1(79.3,28.1) 80.425,26.975 U300.1@81.525,26.975
  Bottom Layer w0.254: v1(70.9,32.6) 75.2,32.6 79.237,28.563 79.237,28.163 v1(79.3,28.1)
COL_SIG1: R312.1 U300.2 | length 15.7
  Top Layer w0.254: R312.1 70.162,34.588 v1(70.9,34.588) ; v1(80.4,28.1) 80.431,28.131 81.902,28.131 82.082,27.951 82.082,27.068 U300.2@82.175,26.975
  Bottom Layer w0.254: v1(70.9,34.588) 72.506,32.981 75.358,32.981 79.158,29.181 79.319,29.181 v1(80.4,28.1)
COL_SIG2: R322.1 U300.3 | length 20.6
  Top Layer w0.254: R322.1 v1(70.8,40.1) ; v1(81.058,28.842) 81.958,28.842 82.735,28.065 82.735,27.065 U300.3@82.825,26.975
  Bottom Layer w0.254: v1(70.8,40.1) 70.8,40.066 71.3,39.566 71.3,36.291 74.229,33.362 75.516,33.362 79.316,29.562 80.338,29.562 v1(81.058,28.842)
COL_SIG3: R305.1 U300.4 | length 23
  Top Layer w0.254: R305.1 v1(70.9,42.1) ; v1(81.7,29.6) 82.077,29.223 82.116,29.223 83.116,28.223 83.116,28.184 83.382,27.918 83.382,27.25 U300.4
  Bottom Layer w0.254: v1(70.9,42.1) 70.985,42.015 71.285,42.015 71.681,41.619 71.681,36.449 74.387,33.743 75.792,33.743 78.087,31.448 79.852,31.448 v1(81.7,29.6)
COL_SIG4: R313.1 U300.5 | length 29.2
  Top Layer w0.254: R313.1 70.896,47.6 v1(70.8,47.6) ; v1(82.8,29.6) 84.112,28.287 84.112,26.988 U300.5@84.125,26.975
  Bottom Layer w0.254: v1@70.9,47.596 72.062,46.434 72.062,36.607 74.545,34.124 75.95,34.124 78.245,31.829 80.692,31.829 82.8,29.721 v1(82.8,29.6)
COL_SIG5: R323.1 U300.6 | length 31.6
  Top Layer w0.254: R323.1 v1(70.8,49.6) ; v1(83.9,29.6) 84.775,28.725 U300.6@84.775,26.975
  Bottom Layer w0.254: v1(70.8,49.6) 70.9,49.6 72.443,48.057 72.443,36.765 74.703,34.505 76.108,34.505 78.403,32.21 81.29,32.21 v1(83.9,29.6)
COL_SIG6: R306.1 U300.7 | length 37.8
  Top Layer w0.254: R306.1 v1(70.9,55.1) ; U300.7@85.425,26.975 85.462,27.012 85.462,28.563 v1(85.5,28.6)
  Bottom Layer w0.254: v1(70.9,55.1) 72.824,53.176 72.824,36.923 74.861,34.886 76.266,34.886 78.561,32.591 82.009,32.591 84.7,29.9 84.7,29.4 v1(85.5,28.6)
COL_SIG7: R314.1 U301.1 | length 44.6
  Top Layer w0.254: R314.1 v1(70.9,57.1) ; v1(89.479,28.9) 90.393,27.986 90.393,27.74 91.1,27.032 91.627,27.032 91.684,26.975 U301.1@91.725,26.975
  Bottom Layer w0.254: v1(70.9,57.1) 73.205,54.795 73.205,37.081 75.019,35.267 76.424,35.267 78.719,32.972 85.407,32.972 v1(89.479,28.9)
COL_SIG8: R324.1 U301.2 | length 50.9
  Top Layer w0.254: R324.1 70.15,62.6 v1(70.9,62.6) ; v1(90.7,28.9) 90.7,28.779 91.383,28.096 92.128,28.096 92.277,27.947 92.277,27.073 U301.2@92.375,26.975
  Bottom Layer w0.254: v1(70.9,62.6) 73.586,59.914 73.586,37.238 75.176,35.648 76.581,35.648 78.876,33.353 86.247,33.353 v1(90.7,28.9)
COL_SIG9: R307.1 U301.3 | length 53
  Top Layer w0.254: R307.1 v1(70.9,64.6) ; v1(91.8,28.9) 91.863,28.9 92.927,27.836 92.927,27.073 U301.3@93.025,26.975
  Bottom Layer w0.254: v1(70.9,64.6) 73.967,61.533 73.967,37.396 75.334,36.029 76.739,36.029 79.034,33.734 86.966,33.734 v1(91.8,28.9)
COL_SIG10: R315.1 U301.4 | length 59
  Top Layer w0.254: R315.1 v1(70.9,70.1) ; v1(93,28.9) 93.598,28.302 93.598,27.094 U301.4@93.577,27.073
  Bottom Layer w0.254: v1(70.9,70.1) 74.348,66.652 74.348,37.554 75.492,36.41 76.897,36.41 79.192,34.115 87.785,34.115 v1(93,28.9)
COL_SIG11: R325.1 U301.5 | length 61.7
  Top Layer w0.254: R325.1 v1(70.9,72.1) ; v1(94.3,28.3) 94.313,28.287 94.313,26.988 U301.5@94.325,26.975
  Bottom Layer w0.254: v1(70.9,72.1) 74.729,68.271 74.729,37.712 75.65,36.791 77.055,36.791 79.35,34.496 88.404,34.496 93.8,29.1 93.8,29.092 94.215,28.677 94.215,28.385 v1(94.3,28.3)
COL_ST_CP: H2.3 U1.5 U300.12 U301.12 | length 48.5
  Top Layer w0.254: U300.12@84.125,32.825 84.223,32.727 84.223,32.068 85.891,30.4 94.3,30.4 96.3,28.4 v1(96.3,28.3) ; v1(94.3,31.6) 94.313,31.613 94.313,32.812 U301.12@94.325,32.825
  Bottom Layer w0.254: 69.1,26.538 95.738,26.538 96.3,27.1 v1(96.3,28.3) 96.3,29.1 94.313,31.087 94.313,31.587 v1(94.3,31.6)
EXT_SUPP_EN: R102.1 U101.3 U102.5
GND: C2.2 C3.2 C100.2 C101.2 C102.2 C103.2 C300.2 C301.2 C302.2 H5.4 H7.1 H7.2 H7.3 H7.4 H100.1 H100.3 H100.5 H100.6 H100.8 J100.1 J100.2 J100.3 J100.14 J100.15 J100.16 R100.1 R101.1 R317.3 SW1.1 SW1.2 SW2.1 SW2.2 U1.1 U1.40 U1.41 U1.42 U1.43 U1.44 U1.45 U1.46 U1.47 U1.48 U1.49 U100.2 U100.4 U101.2 U101.5 U102.2 U300.8 U301.8 U302.1 | length 2.8
  Top Layer w0.3: C301.2@88.65,33 88.65,33.125 89.925,34.4 v1(90.8,34.4)
GPIO1: H3.1 U1.39
GPIO2: H3.2 U1.38
GPIO3: H4.1 U1.15
GPIO8: H2.10 U1.12
GPIO9: H4.3 U1.17
GPIO10: H4.4 U1.18
GPIO11: H4.5 U1.19
GPIO12: H4.6 U1.20
GPIO13: H4.7 U1.21
GPIO14: H4.8 U1.22
GPIO15: H2.6 U1.8 U302.3 | length 14.4
  Top Layer w0.254: v1(80.045,72.755) 81.066,73.775 U302.3
  Bottom Layer w0.254: 69.6,73.1 79.7,73.1 v1(80.045,72.755)
GPIO16: H2.7 U1.9 U302.4 | length 14.3
  Top Layer w0.254: v1(81.14,72.76) 81.261,72.76 81.626,73.125 U302.4
  Bottom Layer w0.254: 69.6,73.5 80.4,73.5 v1(81.14,72.76)
GPIO17: H2.8 U1.10 U302.13 | length 20.1
  Top Layer w0.254: v1(88,73.1) 88.012,73.113 89.313,73.113 U302.13
  Bottom Layer w0.254: 69.6,73.919 87.181,73.919 v1(88,73.1)
GPIO18: H2.9 U1.11 U302.2 | length 14.2
  Top Layer w0.254: v1(81.6,74.7) 81.721,74.7 81.996,74.425 U302.2
  Bottom Layer w0.254: 69.6,74.3 81.2,74.3 v1(81.6,74.7)
GPIO19: H2.11 R3.1
GPIO20: H2.12 R4.1
GPIO21: H4.9 U1.23
GPIO35: H3.12 U1.28
GPIO36: H3.11 U1.29
GPIO37: H3.10 U1.30
GPIO38: H3.9 U1.31
GPIO39: H3.8 U1.32
GPIO40: H3.7 U1.33
GPIO41: H3.6 U1.34
GPIO42: H3.5 U1.35
GPIO45: H4.12 U1.26
GPIO46: H4.2 U1.16
GPIO47: H4.10 U1.24
GPIO48: H4.11 U1.25
MCU_BOOT: SW2.3 SW2.4 U1.27
MCU_EN: C3.1 R14.2 SW1.3 SW1.4 U1.3
NetC101_1: C101.1 J100.4 J100.13 U100.1
NetH5_2: H5.2 R1.2
NetH5_3: H5.3 R2.2
NetJ100_5: J100.5 R100.2
NetJ100_11: J100.11 R101.2
NetQ300_1: Q300.1 R300.2 R304.2 | length 3.8
  Top Layer w0.254: R300.2@70,30.85 R300.2 Q300.1 72,32.55 R304.2
NetQ301_1: Q301.1 R301.2 R305.2 | length 4.1
  Top Layer w0.254: R305.2 72,42.05 72.2,41.85 73.8,41.85 73.9,41.85 R301.2 ; R301.2@73.71,41.86 Q301.1@75.7,41.86
NetQ302_1: Q302.1 R302.2 R306.2 | length 3.7
  Top Layer w0.254: R302.2@70.01,53.36 Q302.1 R306.2@72,55.05
NetQ303_1: Q303.1 R303.2 R307.2 | length 3.9
  Top Layer w0.254: R307.2@72.15,64.6 72.4,64.35 R303.2@74,64.35 ; R303.2@73.91,64.36 Q303.1
NetQ304_1: Q304.1 R308.2 R312.2 | length 3.9
  Top Layer w0.254: R312.2 72.3,34.35 R308.2 ; R308.2@73.9,34.36 Q304.1
NetQ305_1: Q305.1 R309.2 R313.2 | length 3.7
  Top Layer w0.254: R309.2@70.01,45.86 Q305.1 72,47.446 72,47.554 R313.2
NetQ306_1: Q306.1 R310.2 R314.2 | length 3.9
  Top Layer w0.254: R314.2 72.3,56.85 R310.2@73.9,56.85 ; R310.2@73.81,56.86 Q306.1@75.8,56.86
NetQ307_1: Q307.1 R311.2 R315.2 | length 3.7
  Top Layer w0.254: R311.2 72,68.36 R315.2@72,70.05
NetQ308_1: Q308.1 R318.2 R322.2 | length 3.8
  Top Layer w0.254: R318.2@70.01,38.36 Q308.1@72,38.36 ; Q308.1 Q308.1@72,38.36 ; R322.2 72,40.05 72,39.8 Q308.1@72,38.36
NetQ309_1: Q309.1 R319.2 R323.2 | length 4.1
  Top Layer w0.254: R323.2 72.05,49.4 72.09,49.36 R319.2@73.9,49.36 ; R319.2 R319.2@73.9,49.36 ; Q309.1 R319.2@73.9,49.36
NetQ310_1: Q310.1 R320.2 R324.2 | length 3.9
  Top Layer w0.254: R320.2 72,60.86 72,62.65 R324.2
NetQ311_1: Q311.1 R321.2 R325.2 | length 3.9
  Top Layer w0.254: R325.2 72.29,71.86 Q311.1@75.9,71.86
NetR316_1: R316.1 U302.15 | length 2.4
  Top Layer w0.254: U302.15 89.39,74.49 90.24,74.49 91.1,75.35 R316.1
NetR316_2: R316.2 R317.1 R317.2 | length 7.8
  Top Layer w0.254: R316.2 93.85,73.45 R317.1@94.05,73.45 ; R317.1 96.6,73.46 R317.2@96.6,76
NetU300_9: U300.9 U301.14 | length 9.5
  Top Layer w0.254: U300.9@86.075,32.825 86.173,32.727 86.173,31.349 86.322,31.2 92.059,31.2 92.927,32.068 92.927,32.727 U301.14@93.025,32.825
ROW0: D200.1 D201.1 D202.1 D203.1 D204.1 D205.1 D206.1 D207.1 D208.1 D209.1 D210.1 D211.1 U302.5 | length 39
  Top Layer w0.254: D200.1@81.472,35.128 81.419,35.181 81.419,66.206 81.525,66.312 81.525,66.875 81.419,66.981 81.419,71.519 82.375,72.475 U302.5
ROW1: D212.1 D213.1 D214.1 D215.1 D216.1 D217.1 D218.1 D219.1 D220.1 D221.1 D222.1 D223.1 U302.6 | length 40.9
  Top Layer w0.254: U302.6@84.006,71.825 82.425,71.825 81.819,71.219 81.819,69.681 82.1,69.4 83.7,69.4 84.919,68.181 84.919,66.981 84.972,66.928 85.025,66.875 85.025,63.984 85.025,61.093 85.025,58.202 85.025,55.312 85.025,52.421 85.025,49.53 85.025,46.639 85.025,43.748 85.025,40.857 85.025,37.966 85.025,35.85 84.919,35.744 84.919,35.181 D212.1@84.972,35.128
ROW2: D224.1 D225.1 D226.1 D227.1 D228.1 D229.1 D230.1 D231.1 D232.1 D233.1 D234.1 D235.1 U302.7 | length 42.4
  Top Layer w0.254: U302.7 83.42,71.12 82.349,71.12 82.2,70.972 82.2,70.249 82.668,69.781 86.87,69.781 88.419,68.232 88.419,66.981 88.472,66.928 88.525,66.875 88.525,66.312 88.419,66.206 88.419,35.181 D224.1@88.472,35.128
ROW3: D236.1 D237.1 D238.1 D239.1 D240.1 D241.1 D242.1 D243.1 D244.1 D245.1 D246.1 D247.1 U302.8 | length 42.7
  Top Layer w0.254: U302.8 86.875,70.525 87.8,69.6 90.7,69.6 91.819,68.481 91.819,66.981 91.872,66.928 91.925,66.875 91.925,58.256 91.925,52.474 91.925,35.85 91.819,35.744 91.819,35.181 D236.1@91.872,35.128
ROW4: D248.1 D249.1 D250.1 D251.1 D252.1 D253.1 D254.1 D255.1 D256.1 D257.1 D258.1 D259.1 U302.9 | length 40.7
  Top Layer w0.254: U302.9 93.975,70.525 95.319,69.181 95.319,66.981 95.372,66.928 95.425,66.875 95.425,66.312 95.319,66.206 95.319,64.037 95.319,55.365 95.319,49.583 95.319,35.181 D248.1@95.372,35.128
ROW5: D260.1 D261.1 D262.1 D263.1 D264.1 D265.1 D266.1 D267.1 D268.1 D269.1 D270.1 D271.1 U302.10 | length 44.7
  Top Layer w0.254: U302.10 97.125,71.175 98.819,69.481 98.819,66.981 98.872,66.928 98.925,66.875 98.925,66.312 98.819,66.206 98.819,64.037 98.819,55.365 98.819,49.583 98.819,35.181 D260.1@98.872,35.128
ROW6: D272.1 D273.1 D274.1 D275.1 D276.1 D277.1 D278.1 D279.1 D280.1 D281.1 D282.1 D283.1 U302.11 | length 47.8
  Top Layer w0.254: U302.11 98.875,71.825 102.319,68.381 102.319,66.981 102.372,66.928 102.425,66.875 102.425,55.365 102.425,49.583 102.425,35.85 102.319,35.744 102.319,35.181 D272.1@102.372,35.128
ROW7: D284.1 D285.1 D286.1 D287.1 D288.1 D289.1 D290.1 D291.1 D292.1 D293.1 D294.1 D295.1 U302.12 | length 51.2
  Top Layer w0.254: U302.12 99.425,72.475 102.3,69.6 104.302,69.6 105.819,68.083 105.819,61.013 105.819,52.394 105.819,49.52 105.819,43.774 D284.1@105.819,35.155
UPDI_RX: H3.4 R1.1 U1.36
UPDI_TX: H3.3 R2.1 U1.37
USB_D_N: J100.8 J100.10 R3.2 U1.13
USB_D_P: J100.7 J100.9 R4.2 U1.14
USB_SUPP_EN: C102.1 U100.3 U101.1 U102.3
V_MCU: H100.7 R102.2 U102.1
VCC_1: H100.2 Q300.2 Q301.2 Q302.2 Q303.2 Q304.2 Q305.2 Q306.2 Q307.2 Q308.2 Q309.2 Q310.2 Q311.2 R300.1 R301.1 R302.1 R303.1 R308.1 R309.1 R310.1 R311.1 R318.1 R319.1 R320.1 R321.1 | length 111.1
  Top Layer w0.5: R318.1@69.995,36.455 68.9,36.455 ; R302.1 68.9,51.455 ; R318.1@70,36.45 R318.1 Q308.2 72,36.44 74.946,36.44 v1(75.9,37.395) ; R302.1@70,51.45 70.005,51.445 71.995,51.445 Q302.2 ; Q300.2 Q300.2@71.998,28.942 ; Q307.2@72,66.44 71.995,66.445 70.005,66.445 70,66.45 69.8,66.45 68.9,65.55 68.9,58.95 ; Q307.2 v1@75.862,66.437 ; Q302.2@72.1,51.44 v1@75.96,51.44 ; R310.1 73.805,54.945 Q306.2 Q306.2@75.8,54.94 ; R308.1 73.905,32.445 75.795,32.445 Q304.2@75.798,32.442 ; R301.1@73.9,39.95 R301.1 75.695,39.945 Q301.2@75.7,39.94 ; R319.1 73.905,47.445 75.895,47.445 Q309.2 ; R303.1@73.9,62.45 R303.1 75.895,62.445 Q303.2 v1(75.9,60.8) ; R321.1 73.905,69.945 Q311.2 Q311.2@75.9,69.94 ; v1(75.5,29) 75.47,28.97 72.025,28.97 Q300.2@71.998,28.942 ; v1(75.5,30.6) 75.538,30.638 75.538,32.365 75.616,32.442 Q304.2@75.798,32.442 ; v1@75.76,43.94 75.74,43.92 72.02,43.92 Q305.2 71.995,43.945 70.005,43.945 R309.1 68.9,43.95 ; Q304.2 Q304.2@75.798,32.442 ; v1(75.8,45.8) Q309.2@75.8,47.44 ; Q304.2@75.897,32.442 Q304.2@75.798,32.442 ; v1(75.9,38.9) 75.862,38.938 75.862,39.902 Q301.2 ; v1(75.9,58.9) 75.846,58.9 75.768,58.822 73.761,58.822 73.643,58.94 72,58.94 Q310.2 70.005,58.945 70,58.95 68.9,58.95 ; v1(75.902,68.298) Q311.2@75.902,69.937 ; v1(76,53.3) Q306.2@76,54.94 ; 68.9,36.455 68.9,43.95 ; 68.9,36.455 68.9,28.95 70,28.95 70.005,28.945 71.995,28.945 Q300.2@71.998,28.942 ; 68.9,43.95 68.9,51.455 ; 68.9,51.455 68.9,58.95
  Bottom Layer w0.5: v1(75.5,29) v1(75.5,30.6) ; v1(75.8,43.9) v1(75.8,45.8) ; v1(75.9,37.395) v1(75.9,38.9) ; v1(75.9,58.9) v1(75.9,60.8) ; v1(75.902,66.397) v1(75.902,68.298) ; v1(76,51.4) v1(76,53.3)
VCC_2: H100.4
pads on no net: J100.6 J100.12 U101.4 U102.4 U300.15 U301.6 U301.7 U301.9 U301.15 U302.14

## Other copper
Top Layer:
  pour cut-out: 106.8,69.5 106.8,34 79.2,34 79.2,69.5
  pour cut-out: 106.8,69.5 106.8,34 79.2,34 79.2,69.5

## Silkscreen, mask and mechanical layers (free items; w line width, h text height)
Top Overlay:
  lines w0.2: 79.2,34.2 79.2,69.3 106.6,69.3 106.6,34.2 79.2,34.2
  text "ROW CONTROL" at 82.157,70.013 h1 r90
  text "LED MATRIX - 8 ROWS 12 COLUMNS" at 107.9,37.038 h1 r90
  text "COL CONTROL" at 100.457,26.413 h1 r90
Bottom Overlay:
  lines w0.8: 75.7,29.2 99.5,29.2
  text "G" at 29.446,60.354 h1.02
  text "+3.3V" at 33.346,57.754 h1.02
  text "G" at 29.446,55.274 h1.02
  text "G" at 29.446,52.734 h1.02
  text "+B" at 30.446,50.354 h1.02
  text "G" at 29.446,47.654 h1.02
  text "+A" at 30.446,45.254 h1.02
  text "G" at 29.446,42.574 h1.02
  text "JANUARY 2025" at 76.36,32.56 h1.4 r270
  text "SCHEMATIC DESIGN AND PCB LAYOUT BY: / ADRIAN SUCAHYO" at 80.1,32.4 h1.5 r270
  text "ESP32 LED MATRIX BOARD V1.0" at 92.1,31.4 h2.5 r270
  text "DESIGNED FOR THE UNIVERSITY OF UTAH IEEE X FSAE ALTIUM WORKSHOP" at 69.5,28.8 h1.27 r270